# EAGLE board 2021-Condensateurs 400i (EAGLE 4.01)
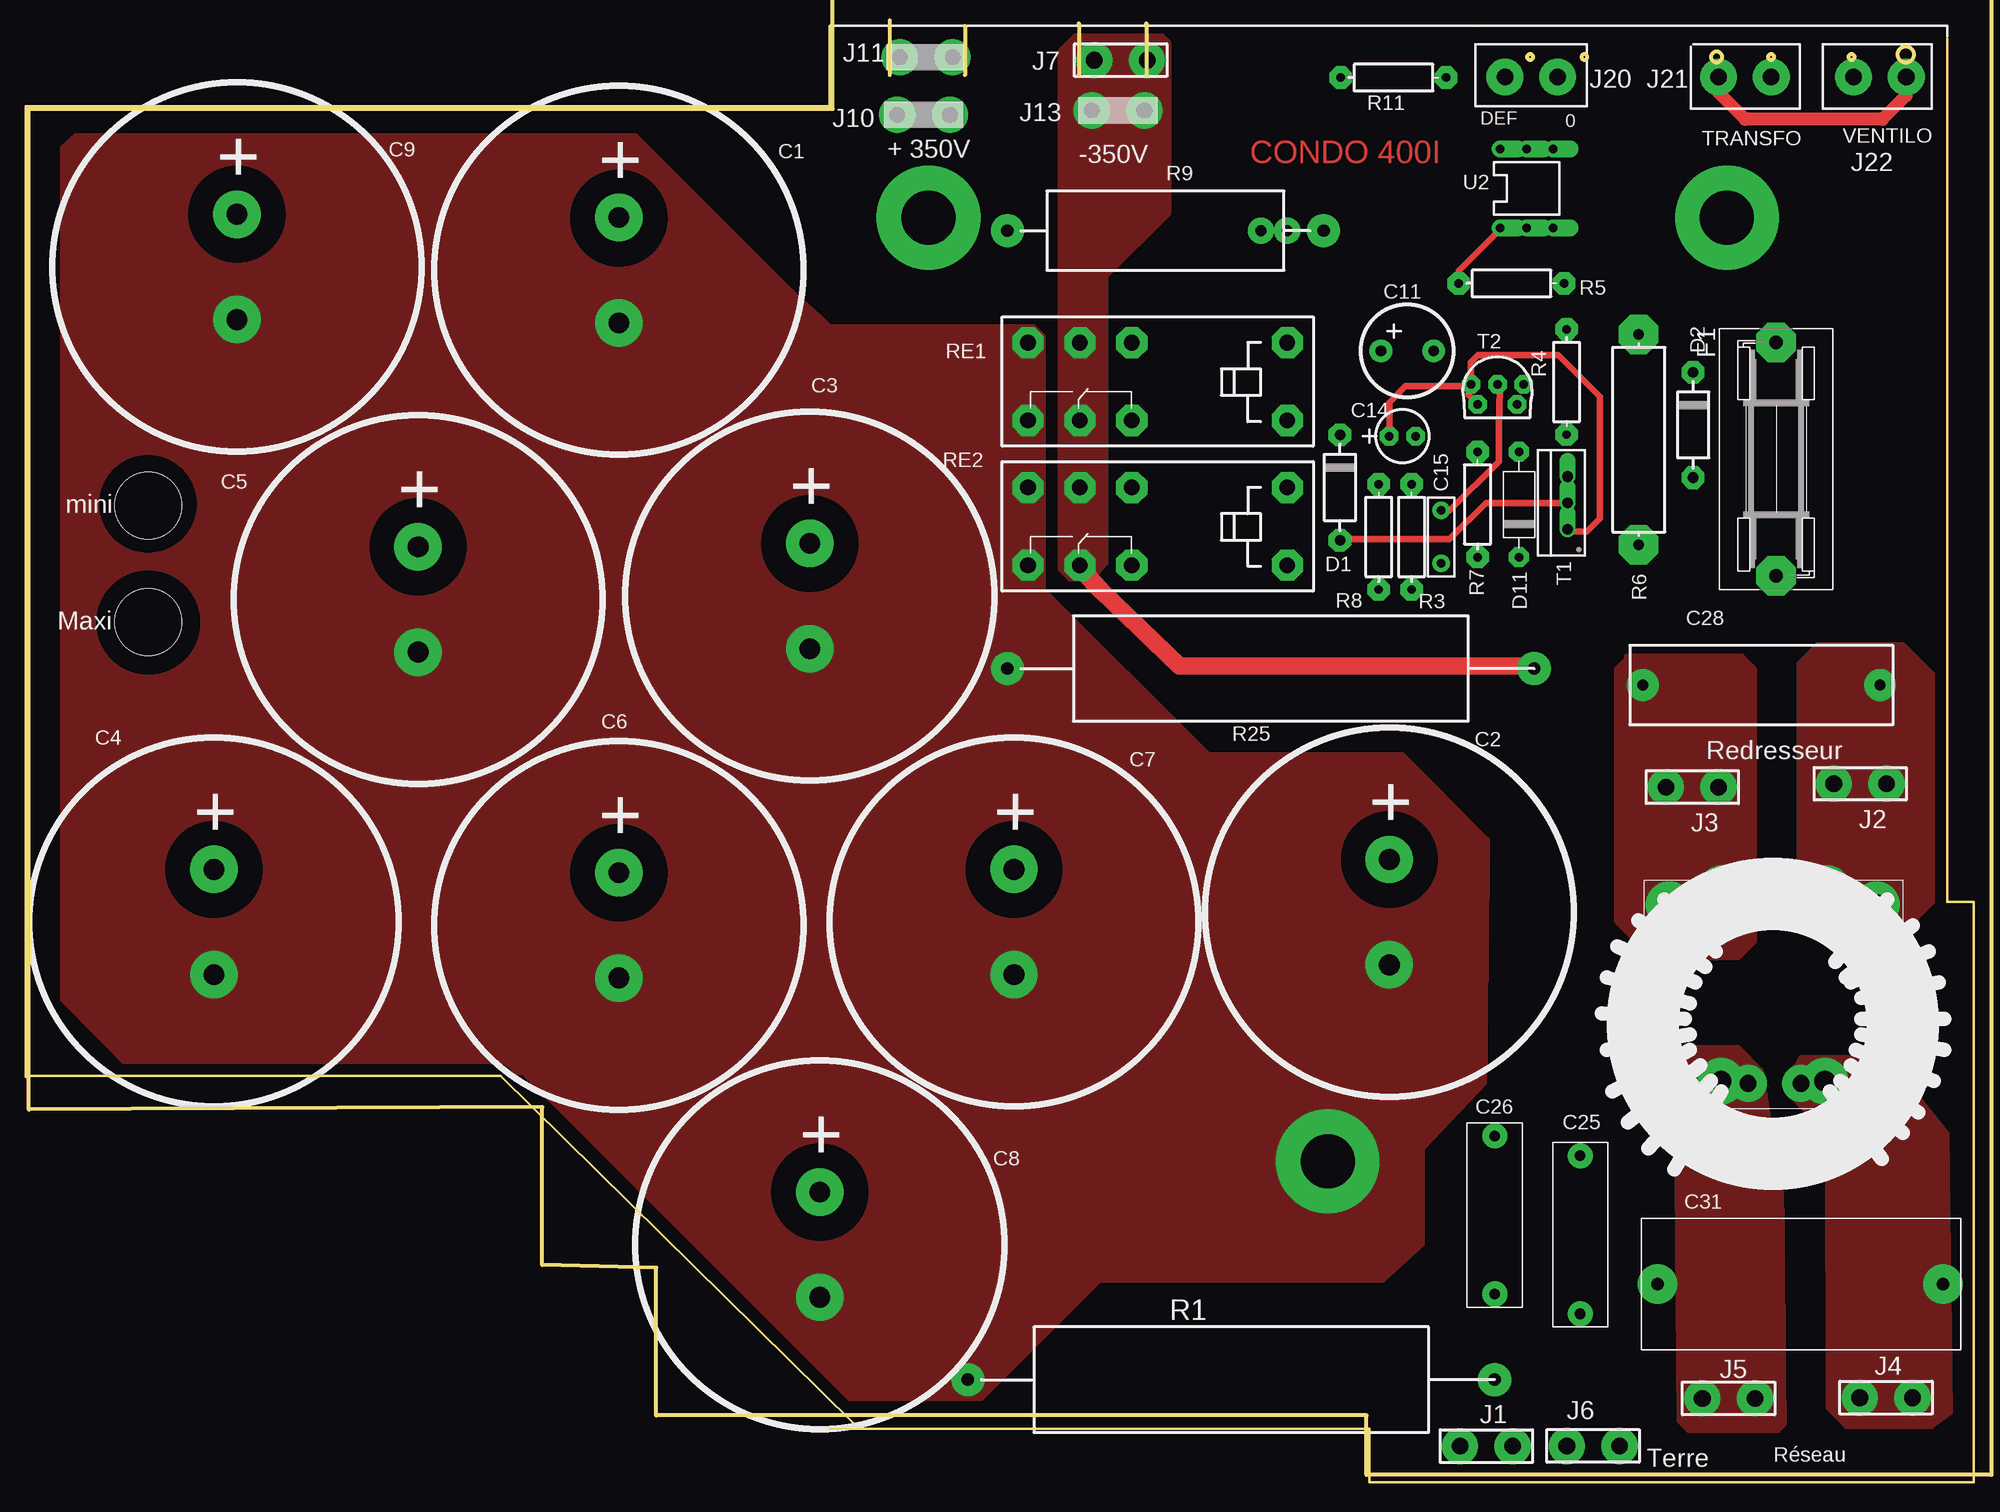
[diagram p0: board, top side]
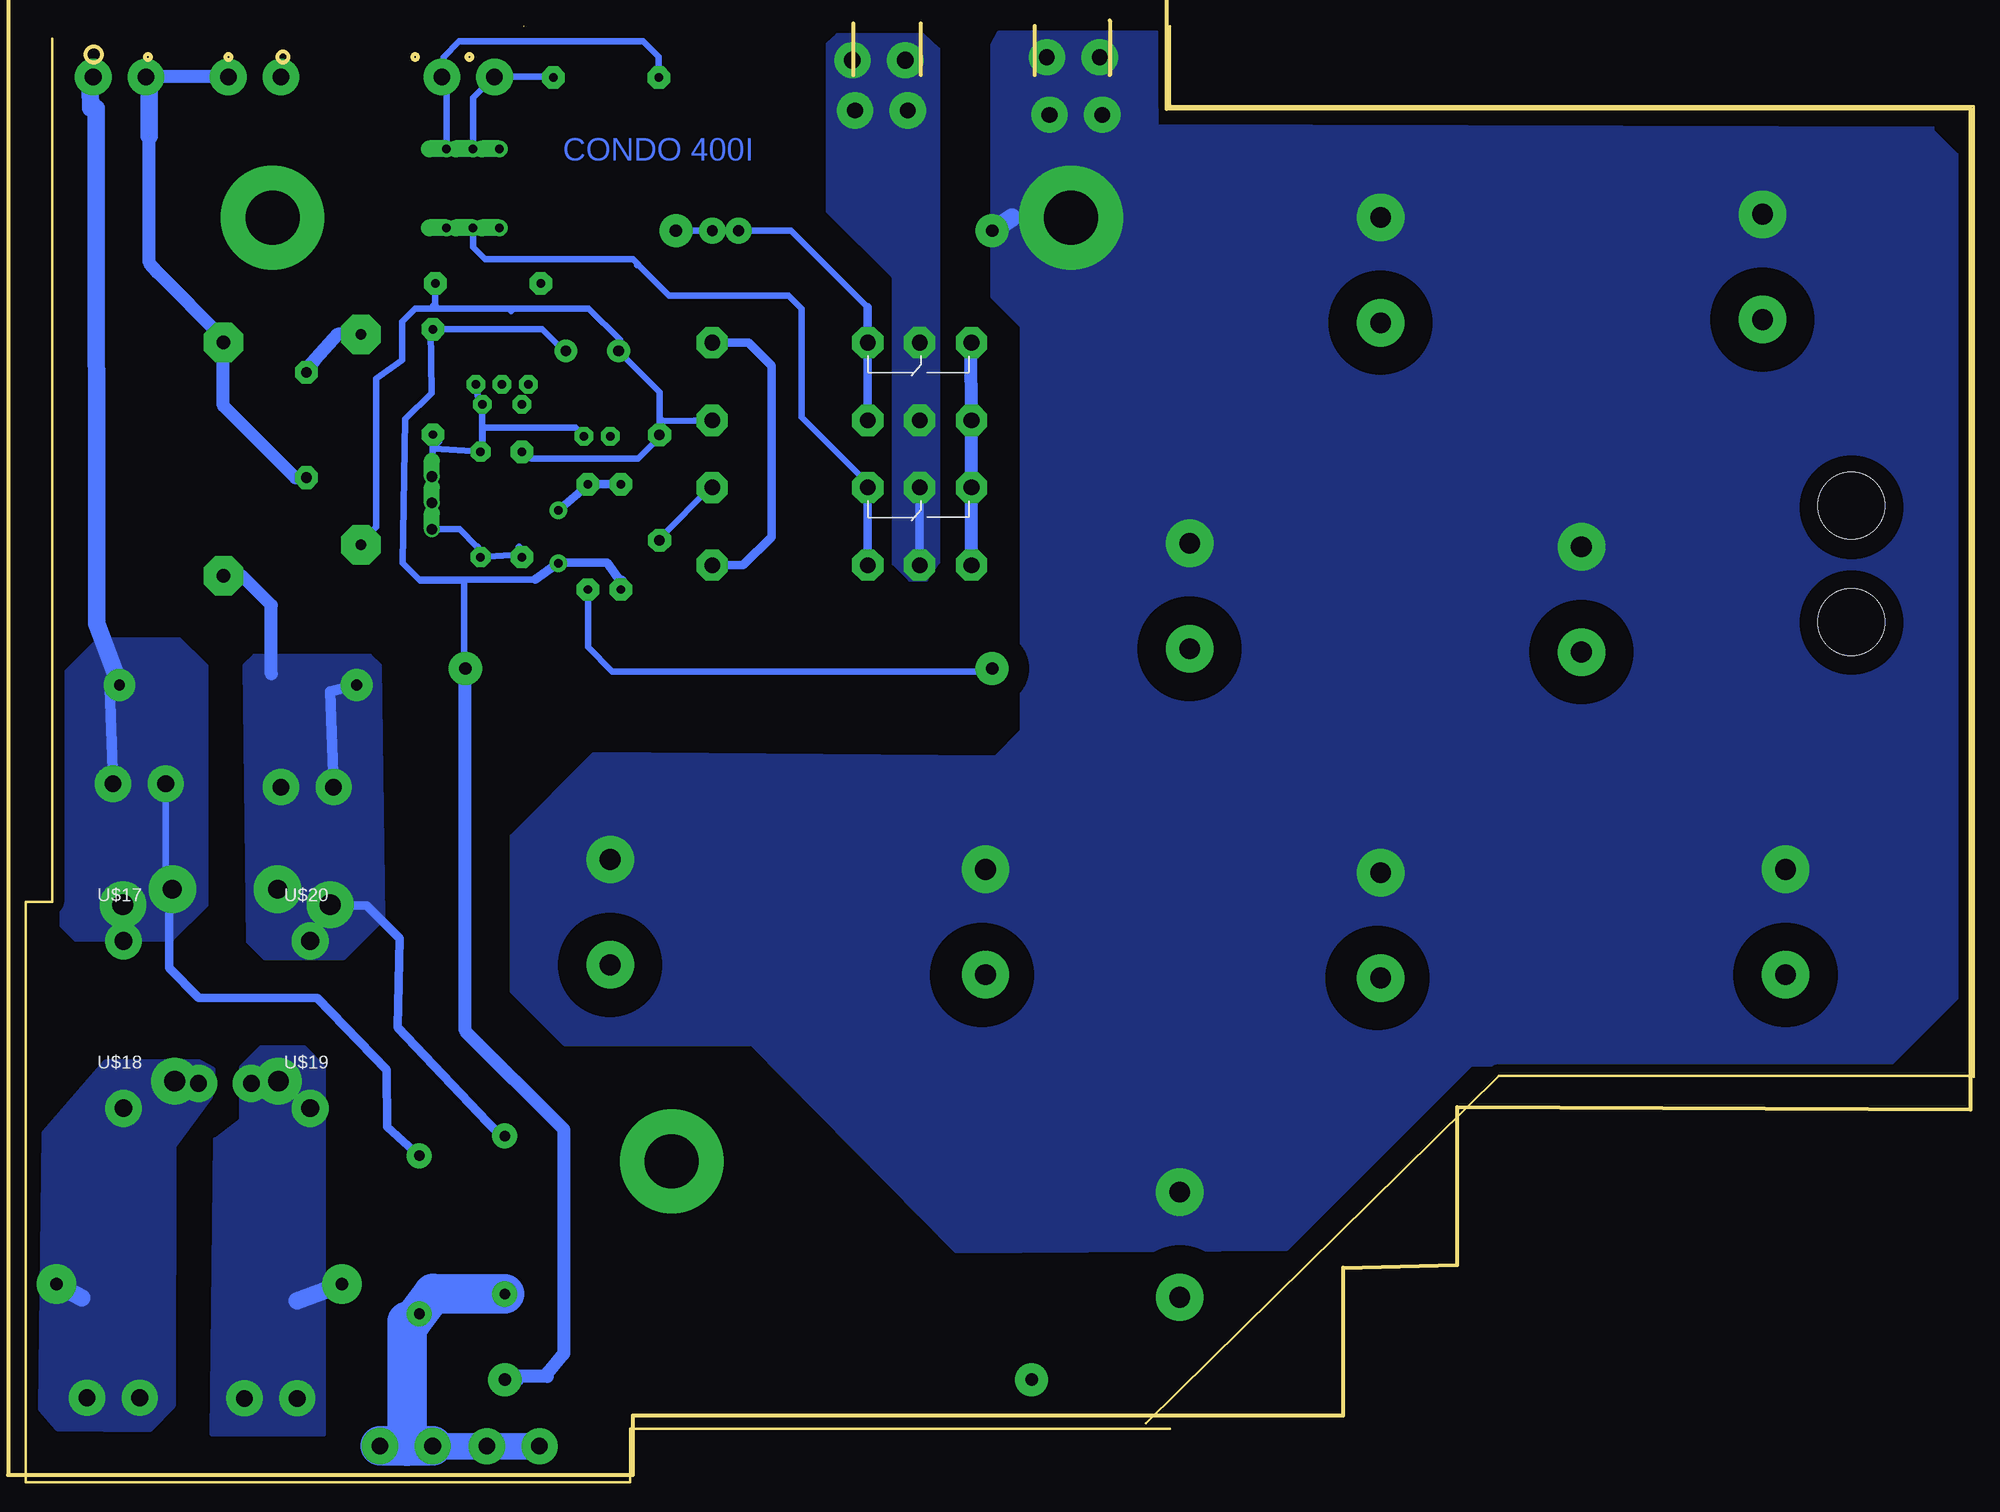
[diagram p1: board, bottom side, seen from below]

Size 187.82 x 140.46 mm. Coordinates in mm from the lower left corner, seen from the top.
Outline: 77.49,5.16 129.57,5.16 129.57,0 187.82,0 187.82,55.96 185.29,55.96 185.29,139.21
Outline: 139.79,140.4 139.79,140.46
Outline: 77.5,140.41 77.5,132.69 0,132.69 0,39.13
Outline: 0.04,39.21 45.79,39.21 79.79,5.71
Copper layers used: Top, Bottom
Holes 6.45 mm at 11.79,94.21 11.79,82.96
tRestrict: area 7.6,90.2 to 15.9,98.5; area 7.3,78.5 to 16.2,87.4; area 16.2,118.2 to 24.5,126.4; area 53.1,117.8 to 61.3,126; area 33.7,86.1 to 41.9,94.4; area 71.5,86.4 to 79.7,94.7; area 14,55 to 22.3,63.2; area 53.1,54.7 to 61.3,62.9; area 91.2,55 to 99.4,63.2; area 127.3,55.9 to 135.6,64.2; area 72.4,23.9 to 80.7,32.1
bRestrict: area 7.5,78.7 to 16,87.2; area 7.5,89.8 to 16,98.3; area 33.4,75.6 to 42.3,84.5; area 13.7,44.5 to 22.6,53.4; area 71.1,75.9 to 80.1,84.8; area 53,44.2 to 62,53.1; area 91.1,44.5 to 100.1,53.4; area 72.1,13.4 to 81,22.3; area 52.7,107.4 to 61.6,116.3; area 15.9,107.7 to 24.8,116.6; area 127,45.5 to 135.9,54.4; area 91.7,75.5 to 97.6,81.5
Milling: area 144.8,137.2 to 145.3,137.7; area 150,137.2 to 150.5,137.7; area 162.5,137 to 163.5,138; area 168,137.2 to 168.5,137.7; area 175.8,137.2 to 176.3,137.7; area 180.5,137 to 182,138.5; 16 lines

## Footprints (pad centres in the part's own frame; a part is rotated, then mirrored left to right if it is on the bottom)
470U_400 = drill 2 pad 4.572 round: N 10.16,0; P 0,0
02P000RA = drill 0.813 pad 1.778 octagon: N 2.54,0; P 0,0
02P010RA = drill 1.016 pad 2.184 round: N 5.08,0; P 0,0
C-5 = drill 0.813 pad 1.676 round: 1 5.08,0; 2 0,0
C-15 = drill 1.016 pad 2.413 round: 1 0,0; 2 15.24,0
C-22 = drill 1.016 pad 3.048 round: 1 2.54,0; 2 25.4,0
C-27,5 = drill 1.2 pad 3.81 round: 1 0,0; 2 27.5,0
D-10_1MM = drill 1.016 pad 2.184 octagon: A -5.08,0; K 5.08,0
D-10 = drill 0.813 pad 1.93 octagon: A -5.08,0; K 5.08,0
SH22,5A = drill 1.321 pad 3.81 octagon: 1 -11.252,0; 2 11.252,0
2_TROUS = drill 1.6 pad 3.5 round: 1 0,0; 2 0,5.08
2_TROUS' = drill 1.5 pad 3.5 round: 1 0,0; 2 0,5.08
L-31,5_2 = drill 2 pad 4.5 round: L1 5,23.5; L2 5,3.5; L'1 22,18.5; L'2 22,8.5
R-50-5W = drill 1.2 pad 3.2 round: 1 2.54,0; 2 53.34,0
R-10 = drill 0.813 pad 2.159 octagon: 1 -5.08,0; 2 5.08,0
R-18 = drill 1.016 pad 3.81 octagon: 1 -8.89,0; 2 11.43,0
R-30-5W = drill 1.2 pad 3.2 round: 1 0,0; 2 30.48,0
FIND16A = drill 1.5 pad 3 octagon: B1 0,0; B2 0,7.5; C1 20,0; C2 20,7.5; R1 15,0; R2 15,7.5; T1 25,0; T2 25,7.5
TO220V = drill 1.016 pad 1.524 offset: 1 0,0; 2 2.54,0; 3 5.08,0
TO92_L = drill 0.813 pad 1.778 octagon: 1 0,0; 2 1.905,1.905; 3 3.81,0; 4 -0.635,1.905; 5 4.445,1.905
DIL6 = drill 0.813 pad 1.651 offset: 1 0,0; 2 2.54,0; 3 5.08,0; 4 5.08,7.62; 5 2.54,7.62; 6 0,7.62
PAST_5,2 = drill 5.2 pad 10 round: 1 0,0
PAST_1,6 = drill 1.6 pad 3.556 round: 1 0,0
PAST_1,8 = drill 1.8 pad 4.572 round: P$1 0,0
PAST_1,0 = drill 1.016 pad 2.54 round: 1 0,0
PAST_1,7S = drill 1.7 pad 3.556 round: P$1 0,0

## Placement (x,y rotation side)
C1  470µF-400V  [470U_400]  57.18,121.98 270 top
C2  470µF-400V  [470U_400]  131.48,60.07 270 top
C3  470µF-400V  [470U_400]  75.6,90.55 270 top
C4  470µF-400V  [470U_400]  18.13,59.12 270 top
C5  470µF-400V  [470U_400]  37.81,90.23 270 top
C6  470uF-400V  [470U_400]  57.18,58.8 270 top
C7  470uF-400V  [470U_400]  95.28,59.12 270 top
C8  470uF-400V  [470U_400]  76.55,28 270 top
C9  470uF-400V  [470U_400]  20.35,122.3 270 top
C11  4.7µF  [02P000RA]  131.48,100.89 0 top
C14  2,2uF-250V  [02P010RA]  130.66,109.11 0 top
C15  100nF  [C-5]  136.48,88.64 90 top
C25  22nF-Y  [C-15]  149.89,16.25 90 top
C26  22nF-Y  [C-15]  141.64,18.16 90 top
C28  220nF-X2  [C-22]  153.38,76.9 0 top
C31  470nF-X2  [C-27,5]  157.35,19.11 0 top
D1  1N 4007  [D-10_1MM]  126.72,95.95 90 top
D2  1N4007  [D-10_1MM]  160.78,101.98 90 top
D11  10V  [D-10]  143.97,94.31 270 top
F1  [SH22,5A]  168.78,98.69 270 top
J1  [2_TROUS]  143.37,3.49 90 top
J2  [2_TROUS]  179.42,67.37 90 top
J3  [2_TROUS]  163.23,67.05 90 top
J4  [2_TROUS]  181.92,8.16 90 top
J5  [2_TROUS]  166.74,8.1 90 top
J6  [2_TROUS]  148.59,3.52 270 top
J7  [2_TROUS]  103.03,137.16 270 top
J10  [2_TROUS']  84.03,131.89 270 top
J11  [2_TROUS']  84.28,137.44 270 top
J13  [2_TROUS']  107.86,132.31 90 top
L1  [L-31,5_2]  154.97,60.7 270 top
R1  22  [R-50-5W]  88.3,9.91 0 top
R3  100k  [R-10]  133.62,91.18 90 top
R4  100  [R-10]  148.57,106.13 270 top
R5  10K  [R-10]  143.25,115.63 0 top
R6  4.7K  [R-18]  155.53,99.29 90 top
R7  220k  [R-10]  139.98,94.31 90 top
R8  22k  [R-10]  130.45,91.18 90 top
R9  33k  [R-30-5W]  125.13,120.71 180 top
R11  22K  [R-10]  131.88,135.47 0 top
R25  22  [R-50-5W]  92.11,78.48 0 top
RE1  4061-48V  [FIND16A]  121.63,109.92 180 top
RE2  4061-48V  [FIND16A]  121.63,95.95 180 top
T1  IRF 830  [TO220V]  148.68,91.92 90 top
T2  BC 547  [TO92_L]  140,103.97 0 top
U2  CNX35  [DIL6]  142.18,120.99 0 top
U$2  PAST_5,2  [PAST_5,2]  164.04,121.96 0 top
U$3  [PAST_1,6]  181.32,135.54 0 top
U$4  [PAST_1,8]  173.7,57.21 0 top
U$5  PAST_5,2  [PAST_5,2]  87.04,121.96 0 top
U$6  [PAST_1,8]  163.54,57.21 0 top
U$7  [PAST_5,2]  125.54,30.96 0 top
U$8  [PAST_1,6]  171.16,38.48 0 top
U$9  [PAST_1,6]  166.08,38.48 0 top
U$10  [PAST_1,6]  176.25,135.54 0 top
U$11  [PAST_1,6]  163.23,135.54 0 top
U$12  [PAST_1,6]  168.31,135.54 0 top
U$13  [PAST_1,6]  142.63,135.54 0 top
U$14  [PAST_1,6]  147.71,135.54 0 top
U$15  [PAST_1,0]  119.09,120.71 90 top
U$16  [PAST_1,0]  121.63,120.71 90 top
U$17  [PAST_1,7S]  178.41,52.21 0 top
U$18  [PAST_1,7S]  178.41,36.09 0 top
U$19  [PAST_1,7S]  160.41,36.09 0 top
U$20  [PAST_1,7S]  160.41,52.21 0 top

## Library data of the parts
C1-C9 C14 C25 C26 C28 C31 = C
C11 D1 D2 R1 R3-R9 R11 R25 = passif
C15 = C@3
D11 = DISCRETE@2
F1 = fuse
J1-J7 = CONNECT
J10 J11 J13 = CONNECT1
L1 = Special1
RE1 RE2 = SPECIAL
T1 T2 = TRANS1
U2 = OPTO
U$2-U$20 = PAST

## Nets
GNDA: C25.1 C26.1 J1.1 J1.2 J6.1 J6.2
N$1: C1.P C2.P C3.P C4.P C5.P C6.P C7.P C8.P C9.P J10.1 J10.2 J11.1 J11.2 R9.2 U$5.1
N$2: C1.N C2.N C3.N C4.N C5.N C6.N C7.N C8.N C9.N R1.1 R3.1 R25.1 RE1.T1 RE1.T2 RE2.T1 RE2.T2 U$7.1
N$3: U$15.1 U$16.1
N$4: C14.P D1.K R5.2 R6.1 R7.2 RE1.B2
N$5: R11.1 U2.4 U$14.1
N$6: D1.A RE2.B1 T1.2
N$7: R11.2 U2.5 U$13.1
N$8: C31.2 J4.1 J4.2 L1.L'1 U$8.1 U$18.P$1
N$9: C11.N D11.A R4.2 T1.3 T2.3 T2.5
N$11: C31.1 J5.1 J5.2 L1.L'2 U$9.1 U$19.P$1
N$12: C26.2 C28.1 F1.2 J3.1 J3.2 L1.L2 U$6.P$1 U$20.P$1
N$13: U2.6
N$14: C11.P D11.K R7.1 T1.1 T2.1 T2.4
N$15: R5.1 U2.1
N$16: RE2.R1 RE2.R2 U2.2
N$18: RE1.B1 RE2.B2
N$19: C25.2 C28.2 J2.1 J2.2 L1.L1 U$3.1 U$4.P$1 U$11.1 U$17.P$1
N$24: R9.1 RE1.R1 RE1.R2
N$62: C14.N C15.2 J7.1 J7.2 J13.1 J13.2 R1.2 R4.1 R8.1 R25.2 RE1.C1 RE1.C2 RE2.C1 RE2.C2
N$65: D2.K R6.2
N$78: C15.1 R3.2 R8.2 T2.2
P1: D2.A F1.1 U$10.1 U$12.1

## Tracks (layer width: path | path; a pad name or v marks a point on that pad's centre or on a via)
GNDA
  Bottom 1.27: 150.6,15.55 C25.1
  Bottom 1.676: 143.54,3.49 J1.1 | J1.2 143.54,3.49 | 143.54,3.49 143.54,3.46 | J6.2 153.79,3.52 153.79,3.49 153.79,3.21
  Bottom 2.54: J1.2 153.79,3.49
  Bottom 3.81: J6.1 J6.2 151.04,3.46 151.04,15.55 150.6,15.55 148.54,18.21 148.54,18.16 C26.1
N$1
  Bottom 1.778: 92.74,121.98 R9.2
  pour Bottom (isolate 0.356, no thermals): 3.84,130.56 78.77,130.81 78.77,139.82 92.71,139.82 93.96,139.85 94.65,138.6 94.65,114.36 91.79,111.5 91.79,72.45 94.33,69.91 133.06,70.23 141,62.29 141,47.37 135.92,42.29 117.82,42.29 98.14,22.29 66.22,22.54 48.44,40.32 8.29,40.07 1.62,46.73 1.62,128.02 4.16,130.56
N$2
  Bottom 0.61: R3.1 133.62,80.55 131.29,78.21 96.04,78.21 95.54,78.71 94.79,78.71 94.79,78.62 R25.1
  Bottom 1.27: RE1.T1 96.64,109.2 96.87,109.92 96.67,109.72 RE1.T2 RE2.T1 96.64,96.35 96.55,96.27 96.64,96.18 RE2.T2
  pour Top (isolate 0.356, no thermals): 4.79,129.92 58.77,129.92 74.01,114.68 76.55,112.46 77.5,111.5 97.19,111.5 98.14,110.55 98.14,86.1 114.01,70.23 132.75,70.23 141,61.98 140.69,38.48 134.65,32.13 134.65,22.92 130.84,19.43 103.54,19.43 92.11,8 79.43,8 48,39.43 10.51,39.43 3.52,46.54 3.52,128.78
N$3
  Bottom 0.406: U$15.1 U$16.1
N$4
  Bottom 0.61: RE1.B2 123.34,102.42 126.54,102.36 | R7.2 139.98,99.65 140.04,99.71 140.04,98.96 139.04,98.71 128.79,98.71 126.72,100.78 D1.K 126.72,105.14 130.69,109.11 | 130.69,109.11 130.79,109.21 | 130.69,109.11 C14.P 130.54,109.23 130.54,110.21 133.54,113.21 148.54,113.21 | 149.29,113.21 150.29,113.21 151.54,111.96 151.54,108.21 154.04,106.46 154.04,92.11 155.54,90.61 R6.1 | 148.54,113.21 148.29,113.21 148.54,113.46 148.54,113.21 | 149.29,113.21 141.21,113.13 141.04,112.96 140.79,113.21 148.54,113.21 | 148.54,113.21 149.29,113.21 | 148.33,115.51 R5.2 | 148.33,115.51 148.29,115.46 | 148.54,113.21 148.29,113.46 148.33,113.51 148.33,115.51
  Bottom 0.813: 126.54,102.36 D1.K
N$5
  Bottom 0.61: U2.4 147.26,134.93 147.79,135.46 | R11.1 126.8,137.47 128.29,138.96 146.04,138.96 147.54,137.46 147.54,135.46 147.79,135.46 | 147.79,135.46 U$14.1
N$6
  Top 0.61: T1.2 140.79,94.46 137.29,90.96 126.54,90.96 126.63,90.87 D1.A
  Bottom 0.61: 121.63,96.11 121.54,96.21 | 121.63,96.11 RE2.B1 | D1.A 126.72,91.03 121.63,96.11
N$7
  Bottom 0.61: U2.5 144.71,133.53 142.71,135.54 U$13.1 137.37,135.54 137.04,135.21 136.96,135.29 R11.2
N$8
  Bottom 1.676: 182.43,17.77 C31.2
  pour Bottom (isolate 0.014, no thermals): 171.16,40.38 180.06,40.38 185.93,33.65 186.24,7.08 184.72,5.3 176,5.24 173.77,7.46 173.7,32.45 170.21,37.21 169.89,39.75
  pour Top (isolate 0.356, no thermals): 171.16,41.02 179.42,41.02 185.29,33.65 185.61,6.66 183.75,5.3 175.61,5.3 173.77,7.14 173.7,33.72 169.89,37.53 169.89,39.43 170.85,40.38
N$9
  Bottom 0.61: 143.55,103.97 143.54,103.96 | 143.55,103.97 T2.3 143.81,99.94 | T2.5 144.19,104.61 143.55,103.97 | 143.81,99.94 143.85,99.64 D11.A 148.54,99.71 148.54,99.82 147.97,100.39 148.57,101 R4.2 148.57,97 | 148.57,97 T1.3 | 148.57,97 148.54,96.96 | C11.N 134.83,101.71 143.79,101.71 143.79,100.71 143.81,99.94
N$11
  Bottom 1.676: C31.1 161.64,17.52
  pour Bottom (isolate 0.014, no thermals): 159.1,40.07 159.1,4.6 169.89,4.6 169.58,33.08 167.04,34.99 167.04,40.07 165.13,41.97 161,41.97
  pour Top (isolate 0.356, no thermals): 161,41.97 165.13,41.97 167.35,39.75 168.1,34.93 169.26,33.4 169.58,5.55 168.94,4.92 160.37,4.92 159.42,5.87 159.1,40.7 160.05,41.66
N$12
  Bottom 0.813: C26.2 141.98,33.4 143.29,34.71 151.98,43.88 151.8,52.45 154.97,55.62 158.46,55.62 158.46,55.7 L1.L2 | 164.29,77.83 164.16,77.96
  Bottom 1.016: J3.2 158.46,76.26 C28.1
  Bottom 1.27: F1.2 167.02,87.44 164.16,84.58 164.16,77.96
  pour Bottom (isolate 0.014, no thermals): 153.7,78.8 153.38,54.36 157.19,50.55 164.81,50.55 166.4,52.13 166.72,78.8 165.77,79.75 154.66,79.75
  pour Top (isolate 0.356, no thermals): 154.34,79.75 165.45,79.75 166.72,78.48 166.72,52.13 165.13,50.55 156.88,50.55 153.38,54.04 153.38,78.48 154.34,79.44
N$14
  Top 0.61: T2.4 139.36,108.03 140.04,108.71 147.79,108.71 151.79,104.71 151.79,92.96 150.54,91.71 148.54,91.71 148.68,91.85 T1.1 | C11.P 131.48,104.15 133.04,105.71 139.04,105.71 139.29,105.96 139.29,105.95 T2.4 | T2.1 139.75,104.17 139.79,104.21 139.11,104.88 T2.4
  Bottom 0.61: T1.1 145.99,91.92 144.29,90.21 144.27,90.23 D11.K 140.31,89.48 140.29,90.21 140.27,90.23 R7.1
N$15
  Top 0.61: U2.1 142.26,120.99 142.29,120.96 138.18,116.85 R5.1
N$16
  Bottom 0.61: RE2.R1 106.63,96.11 106.54,96.21 113.04,102.71 113.04,113.21 114.29,114.46 125.79,114.46 128.72,117.39 128.86,117.39 128.79,117.46 129.29,117.96 143.54,117.96 144.71,119.14 U2.2
  Bottom 0.813: RE2.R2 RE2.R1
N$18
  Bottom 0.813: RE2.B2 118.66,88.45 115.92,91.18 115.92,107.69 118.14,109.92 RE1.B1
N$19
  Top 0.813: 163.23,134.02 U$11.1 | U$3.1 181.32,135.25 181.29,135.21 181.29,133.71
  Top 1.27: 163.23,134.02 165.79,131.46 179.04,131.46 181.29,133.71
  Bottom 0.61: 173.54,57.21 | U$4.P$1 173.54,57.21 | J2.2 174.34,58.01 173.54,57.21
  Bottom 0.813: 181.64,136.18 U$3.1 | C25.2 152.97,34.3 153.04,39.79 159.74,46.73 171.16,46.73 174.02,49.59 174.02,54.67 U$4.P$1
  Bottom 1.016: J2.1 179.74,76.58 C28.2
  Bottom 1.676: C28.2 181,82.84 181.04,132.21 181.04,132.5 181.57,132.5 181.64,136.18
  pour Bottom (isolate 0.014, no thermals): 170.54,78.71 170.54,55.71 173.79,52.46 183.04,52.46 184.29,53.71 184.29,77.71 180.79,81.21 173.04,81.21 170.79,78.96
  pour Top (isolate 0.014, no thermals): 172.79,80.71 181.04,80.71 183.79,77.96 183.79,55.96 180.79,52.96 174.04,52.96 171.04,55.96 171.04,78.96
N$24
  Bottom 0.61: 106.63,113.33 106.66,113.33 114.04,120.71 124.79,120.71 R9.1
  Bottom 0.813: RE1.R2 106.63,109.04 106.4,109.28 106.71,109.6 106.63,109.68 RE1.R1 106.63,113.33
N$62
  Top 1.27: 103.63,86.08 103.54,86.17
  Top 1.676: 103.63,86.08 111.25,78.71 145.22,78.71 R25.2
  Top 1.778: RE2.C2 102.04,87.79 103.54,86.17
  Bottom 0.61: 149.89,87.06 151.48,88.64 151.23,102.55 148.69,105.05 148.79,111.21 149.04,111.21 R4.1 138.04,111.21 135.93,109.11 C14.N | 149.89,87.06 138.73,87.06 | 145.45,79.12 145.54,79.21 145.54,86.96 149.79,86.96 149.89,87.06
  Bottom 0.813: RE2.C2 RE2.C1 | 138.73,87.06 C15.2 | 130.45,86.87 131.79,88.71 136.29,88.71
  Bottom 1.016: 136.29,88.71 136.54,88.46 136.54,88.71 C15.2
  Bottom 1.27: R25.2 145.45,43.56 135.92,34.03 135.92,12.45 137.51,10.54 137.51,10.22 140.37,10.22 140.37,9.91 R1.2 | 130.45,86.87 R8.1
  Bottom 1.676: R25.2 145.45,79.12
  pour Bottom (isolate 0.6, no thermals): 104.17,88.64 102.58,87.06 101,87.06 99.79,88.76 99.79,138.17 101.31,139.57 109.57,139.57 110.52,138.69 110.52,122.62 104.17,116.27
  pour Top (isolate 0.356, no thermals): 101.2,139.57 109.57,139.57 110.2,138.94 110.2,122.3 104.17,116.27 104.17,88.64 102.83,87.06 100.68,87.06 99.73,88.01 99.73,138.1
N$65
  Bottom 1.27: 159.9,108.34 160.91,107.21 | 159.9,108.34 D2.K | R6.2 157.78,110.72 159.9,108.34
N$78
  Top 0.61: T2.2 142.15,105.59 142.04,101.46 142.04,98.46 137.29,93.71 136.54,93.71 136.52,93.72 C15.1
  Bottom 0.61: 133.48,96.21 133.57,96.21 R3.2 | 133.54,96.27 133.48,96.21 | 133.48,96.21 133.29,96.21
  Bottom 0.813: R8.2 133.54,96.27 133.54,96.21 C15.1
P1  (1 unrouted)
  Bottom 1.27: U$12.1 U$10.1 176.56,135.86 | 175.91,129.84 175.91,117.58 175.16,116.71 168.78,110.32 F1.1 168.65,109.95 168.54,109.83 168.79,109.58 168.79,103.83 161.85,96.9 D2.A
  Bottom 1.676: 175.95,130.56 175.93,129.82 175.93,135.22 U$10.1

## Text on the board
Top: CONDO 400I
Bottom: CONDO 400I
tNames: J20 | J21 | DEF | 0 | VENTILO | TRANSFO | J22 | + 350V | -350V | mini | Maxi | Redresseur | Terre | Réseau
tValues: - 350V | +350V | PONT | PONT | TERRE | RESEAU | RESEAU